# Altium PCB only pins(1).PcbDoc
Units mm, origin at the board's own origin, x right, y up, seen from the top; angles counter-clockwise.
Board outline 117.86 x 166.62 mm, 2 copper layers (F.Cu, B.Cu); 28 components, 14 nets, 128 pads, 11 vias.
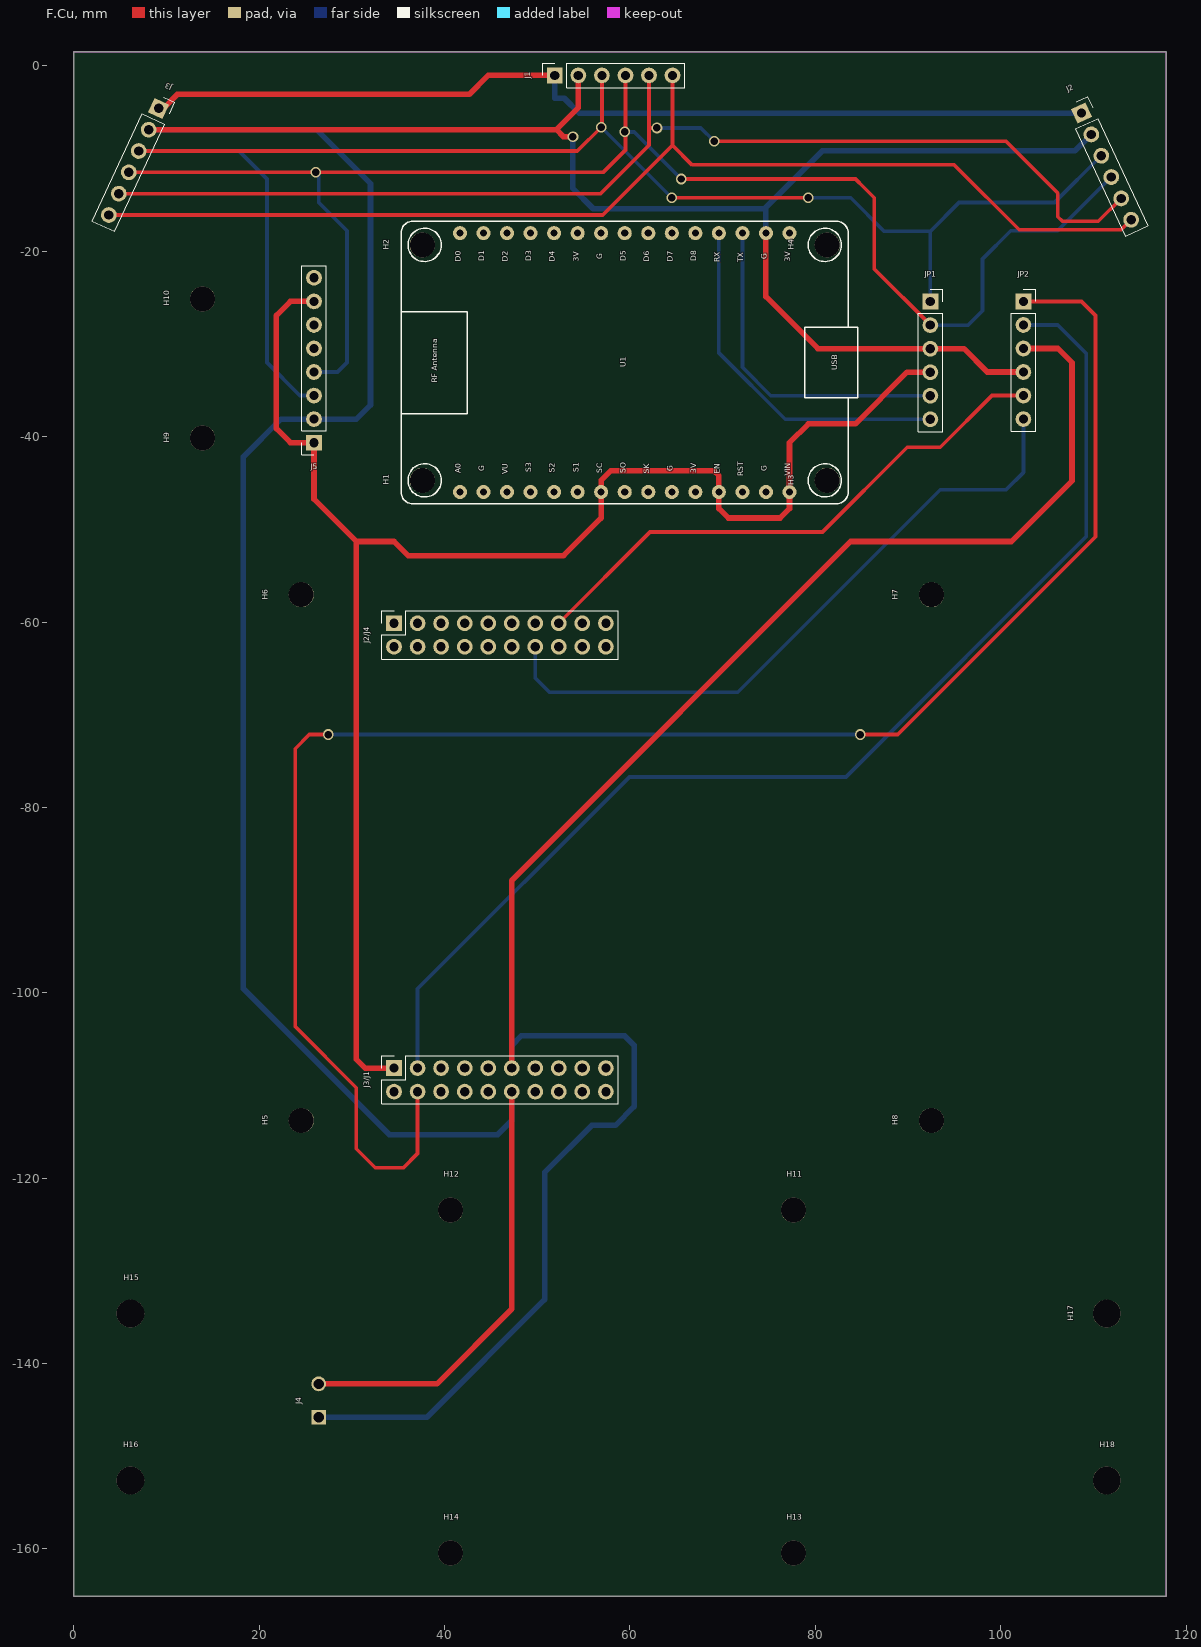
[diagram p0: F.Cu view]
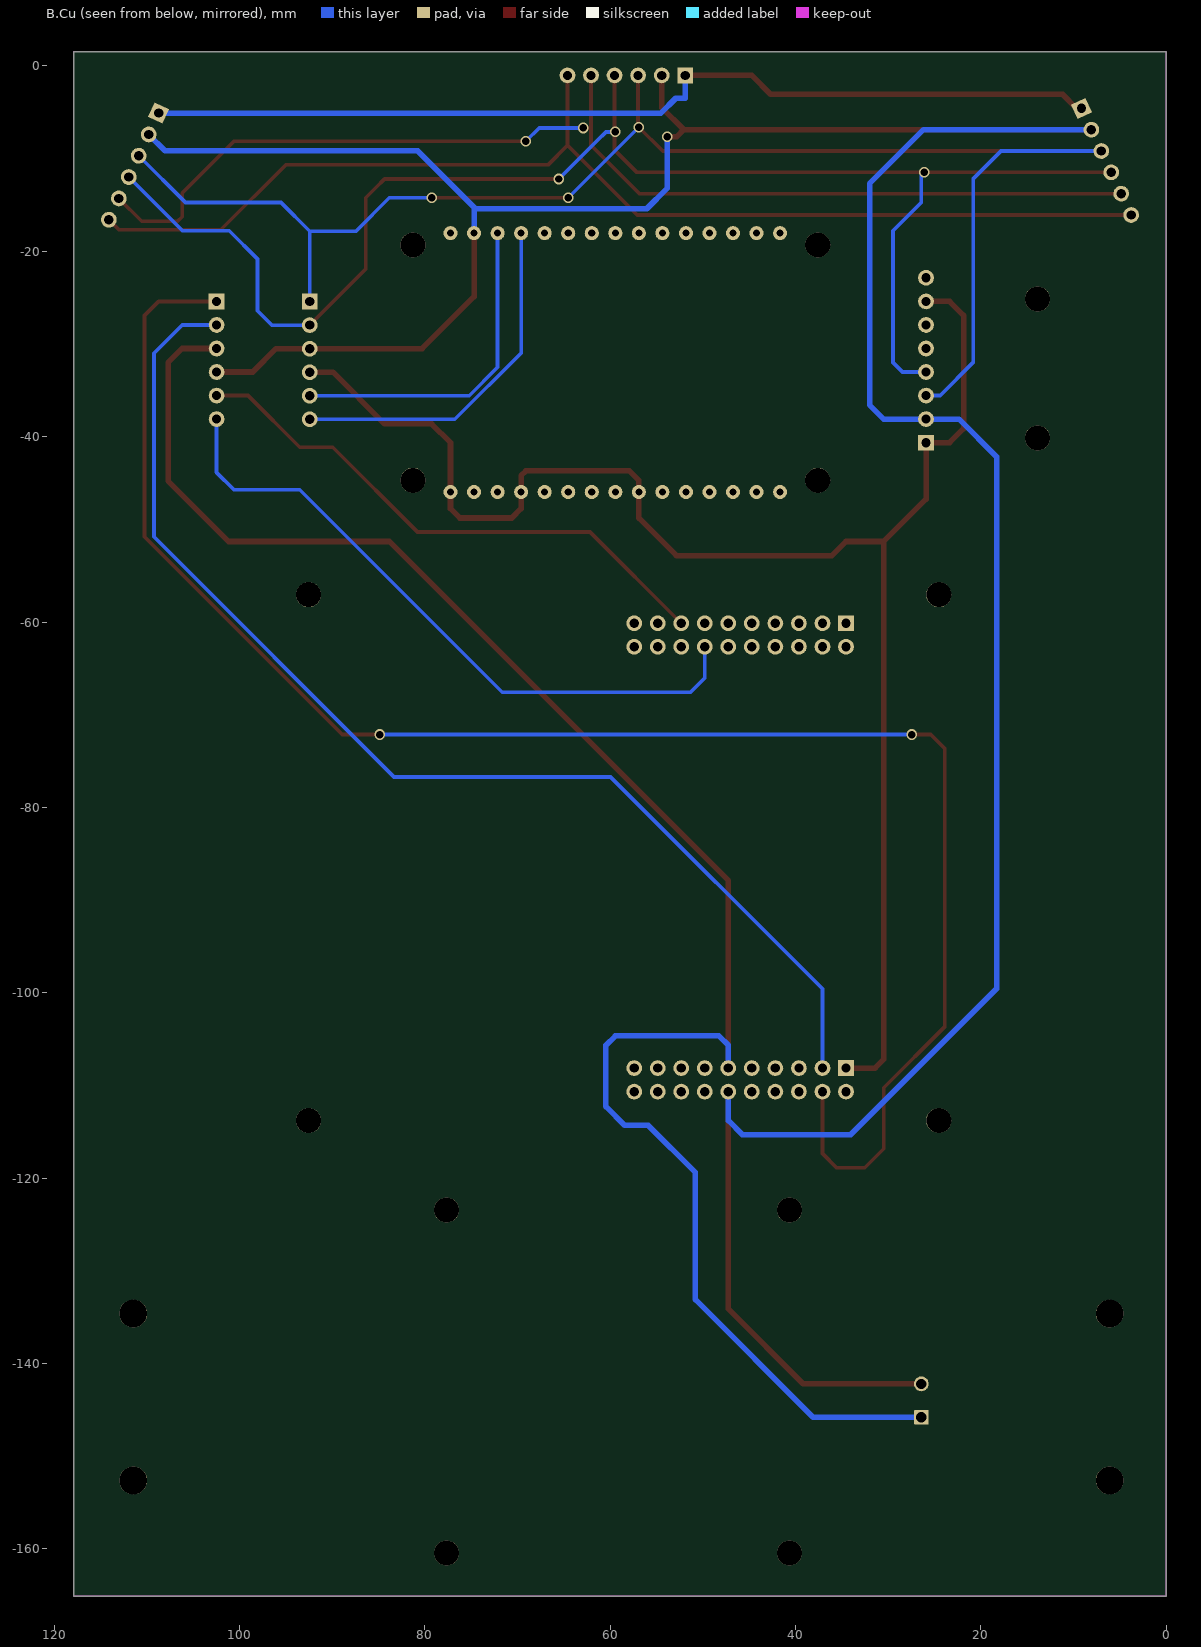
[diagram p1: B.Cu view, seen from below]

## Layer stack, top to bottom
F.Mask: solder mask 0.0102, Solder Resist, Dk 3.5
F.Cu: signal copper 0.0356
Dielectric 1: dielectric 0.32, FR-4, Dk 4.8
B.Cu: signal copper 0.0356
B.Mask: solder mask 0.0102, Solder Resist, Dk 3.5

## Board outline
0,-16.764 0,-165.1 10.16,-165.1 15.24,-165.1 117.856,-165.1 117.856,1.524 116.84,1.524 0,1.524 0,0 0,-16.764

## Design rules (kind name [scope] priority, off if disabled: settings)
Clearance "Clearence 0,3_NetClass" [InNetClass('Default') OR InNetClass('Power')] p1: gap=0.3 ignorepadtopadclearanceinfootprint=FALSE
HoleSize "Hole Size (Default)" [All] p1: absolutevalues=TRUE maxlimit=10 minlimit=0.3 maxpercent=80.000 minpercent=20.000
MinimumSolderMaskSliver [All] p1: minsoldermaskwidth=0
PolygonConnect [All] p1: connectstyle=Direct reliefconductorwidth=0.254 reliefentries=4 polygonreliefangle="90 Angle" airgapwidth=0.254
RoutingVias [All] p1: holewidth=0.711 width=1.27 viastyle="Through Hole" minholewidth=0.711 minwidth=1.27 maxholewidth=0.711 maxwidth=1.27
SilkToSilkClearance [All] p1: silktosilkclearance=0
SilkToSolderMaskClearance [IsPad] p1: minsilkscreentomaskgap=0 clearancetoexposedcopper=TRUE
SolderMaskExpansion [All] p1: expansion=0.102 istentingtop=FALSE
Width [All] p1: maxlimit=10 minlimit=0.2 preferedwidth=0.4 minimp=50.000000 maximp=50.000000 favimp=50.000000
26 further rules are at their usual default settings.

## Classes and differential pairs
net class Power: 3.3V 5V GND VIN
net class Default: A0_RX A0_TX GPIO1 HV3 HV4 LV1 LV2 LV3 LV4 XShutDown

## Components (designator, comment, footprint, x,y, rotation, side; value= is the part's Value field where it differs from the comment)
H1 "MountingHole" MountingHole_2.7mm#1 37.592,-44.704 r90 top
H2 "MountingHole" MountingHole_2.7mm#1 37.592,-19.304 r90 top
H3 "MountingHole" MountingHole_2.7mm#1 81.28,-44.704 r90 top
H4 "MountingHole" MountingHole_2.7mm#1 81.28,-19.304 r90 top
H5 "MountingHole" MountingHole_2.7mm#1 24.528,-113.792 r90 top
H6 "MountingHole" MountingHole_2.7mm#1 24.528,-57.048 r90 top
H7 "MountingHole" MountingHole_2.7mm#1 92.528,-57.048 r90 top
H8 "MountingHole" MountingHole_2.7mm#1 92.528,-113.792 r90 top
H9 "MountingHole" MountingHole_2.7mm#1 13.876,-40.132 r90 top
H10 "MountingHole" MountingHole_2.7mm#1 13.876,-25.132 r90 top
H11 "MountingHole" MountingHole_2.7mm#1 77.64,-123.444 r0 top
H12 "MountingHole" MountingHole_2.7mm#1 40.64,-123.444 r0 top
H13 "MountingHole" MountingHole_2.7mm#1 77.64,-160.444 r0 top
H14 "MountingHole" MountingHole_2.7mm#1 40.64,-160.444 r0 top
H15 "MountingHole_L" MountingHole_2.7mm#2 6.096,-134.62 r0 top
H16 "MountingHole_L" MountingHole_2.7mm#2 6.096,-152.62 r0 top
H17 "MountingHole_R" MountingHole_2.7mm#2 111.442,-134.62 r90 top
H18 "MountingHole_R" MountingHole_2.7mm#2 111.442,-152.62 r0 top
J1 "I2c" PinSocket_1x06_P2.54mm_Vertical 51.896,-1.016 r90 top
J2 "I2c" PinSocket_1x06_P2.54mm_Vertical 108.712,-5.08 r25 top
J2/J4 "~" PinSocket_2x10_P2.54mm_Vertical 34.544,-60.124 r90 top
J3 "I2c" PinSocket_1x06_P2.54mm_Vertical 9.144,-4.572 r335 top
J3/J1 "~" PinSocket_2x10_P2.54mm_Vertical 34.544,-108.124 r90 top
J4 "Power supply" SolderWire-0.1sqmm_1x02_P3.6mm_D0.4mm_OD1mm 26.416,-145.796 r90 top
J5 "gyro connector" PinSocket_1x08_P2.54mm_Vertical 25.908,-40.64 r180 top
JP1 "M06SIP" PinSocket_1x06_P2.54mm_Vertical 92.416,-25.418 r0 top
JP2 "M06SIP" PinSocket_1x06_P2.54mm_Vertical 102.456,-25.4 r0 top
U1 "NodeMCU_1.0_(ESP-12E)" NodeMCU1.0(12-E) 59.436,-32.004 r90 top

## Footprints (in the part's own frame and the unit in brackets; to place one, negate y for a bottom-side part, rotate by r counter-clockwise, add the part's x,y. Pads: shape width x height; smd on the part's side, far side on the other; paste and mask are expansions set on the pad)
MountingHole_2.7mm#1 [mm]
  round 2.7 hole 2.7 paste-2.7 mask+0: 1(0,0)
MountingHole_2.7mm#2 [mm]
  round 3 hole 3 paste-3 mask+0: Un1(0,0)
NodeMCU1.0(12-E) [mil]
  round 60 hole 30 paste-60 mask+0: 1(-550,700) 2(-550,600) 3(-550,500) 4(-550,400) 5(-550,300) 6(-550,200) 7(-550,100) 8(-550,0) 9(-550,-100) 10(-550,-200) 11(-550,-300) 12(-550,-400) 13(-550,-500) 14(-550,-600) 15(-550,-700) 16(550,-700) 17(550,-600) 18(550,-500) 19(550,-400) 20(550,-300) 21(550,-200) 22(550,-100) 23(550,0) 24(550,100) 25(550,200) 26(550,300) 27(550,400) 28(550,500) 29(550,600) 30(550,700)
  silkscreen extent -600,-989 600,950
PinSocket_1x06_P2.54mm_Vertical [mm]
  rect 1.7x1.7 hole 1 paste-1.7 mask+0: 1(0,0)
  rrect100% 1.7x1.7 hole 1 paste-1.7 mask+0: 2(0,-2.54) 3(0,-5.08) 4(0,-7.62) 5(0,-10.16) 6(0,-12.7)
  silkscreen extent -1.33,-14.03 1.33,1.33
PinSocket_1x08_P2.54mm_Vertical [mm]
  rect 1.7x1.7 hole 1 paste-1.7 mask+0: 1(0,0)
  rrect100% 1.7x1.7 hole 1 paste-1.7 mask+0: 2(0,-2.54) 3(0,-5.08) 4(0,-7.62) 5(0,-10.16) 6(0,-12.7) 7(0,-15.24) 8(0,-17.78)
  silkscreen extent -1.33,-19.11 1.33,1.33
PinSocket_2x10_P2.54mm_Vertical [mm]
  rect 1.7x1.7 hole 1 paste-1.7 mask+0: 1(0,0)
  rrect100% 1.7x1.7 hole 1 paste-1.7 mask+0: 2(-2.54,0) 3(0,-2.54) 4(-2.54,-2.54) 5(0,-5.08) 6(-2.54,-5.08) 7(0,-7.62) 8(-2.54,-7.62) 9(0,-10.16) 10(-2.54,-10.16) 11(0,-12.7) 12(-2.54,-12.7) 13(0,-15.24) 14(-2.54,-15.24) 15(0,-17.78) 16(-2.54,-17.78) 17(0,-20.32) 18(-2.54,-20.32) 19(0,-22.86) 20(-2.54,-22.86)
  silkscreen extent -3.87,-24.19 1.33,1.33
SolderWire-0.1sqmm_1x02_P3.6mm_D0.4mm_OD1mm [mm]
  rrect16% 1.6x1.6 hole 1.1 paste-1.6 mask+0: 1(0,0)
  round 1.6 hole 1.1 paste-1.6 mask+0: 2(3.6,0)

## Part data
H1 H2 H3 H4 H5 H6 H7 H8 H9 H10 H11 H12 H13 H14 H15 H16 H17 H18: library part MountingHole_2.7mm, "Mounting Hole 2.7mm, no annular"
J1 J2 J3 JP1 JP2: library part PinSocket_1x06_P2.54mm_Vertical, "Through hole straight socket strip, 1x06, 2.54mm pitch, single row (from Kicad 4.0.7), script generated"
J2/J4 J3/J1: library part PinSocket_2x10_P2.54mm_Vertical, "Through hole straight socket strip, 2x10, 2.54mm pitch, double cols (from Kicad 4.0.7), script generated"
J4: library part SolderWire-0.1sqmm_1x02_P3.6mm_D0.4mm_OD1mm, "Soldered wire connection, for 2 times 0.1 mm² wires, basic insulation, conductor diameter 0.4mm, outer diameter 1mm, size source Multi-Contact FLEXI-E 0.1 (https://ec.staubli.com/AcroFiles/Catalogues/TM_Cab-Main-11014119_(en)_hi.pdf), bend radius 3 times outer diameter, generated with kicad-footprint-generator"
J5: library part PinSocket_1x08_P2.54mm_Vertical, "Through hole straight socket strip, 1x08, 2.54mm pitch, single row (from Kicad 4.0.7), script generated"
U1: library part NodeMCU1.0(12-E)

## Via types
v1: diameter 1.15, hole 0.8, F.Cu to B.Cu, tented both sides, 11 vias

## Nets (pads, with @x,y where several pads share a name; then routed paths per layer and width w, separated by ;. In a path a pad name is that pad's centre, name@x,y a point inside that pad or via, vN(x,y) a via of type N, cw(c..) or ccw(c..) an arc to the next point about the centre after c; other vN are vias at no path point)
3.3V: J3/J1.1 J5.1 J5.7 JP1.4 U1.7 U1.12 U1.15 | length 178.1
  F.Cu w0.6: J5.7 23.368,-25.4 21.844,-26.924 21.844,-39.116 23.368,-40.64 J5.1 25.908,-46.736 30.48,-51.308 ; J3/J1.1 31.416,-108.124 30.48,-107.188 30.48,-58.42 30.48,-51.308 ; JP1.4 89.898,-33.038 84.328,-38.608 79.248,-38.608 77.216,-40.64 U1.15 77.216,-47.752 76.2,-48.768 70.612,-48.768 69.596,-47.752 U1.12 69.596,-44.196 69.088,-43.688 57.912,-43.688 56.896,-44.704 U1.7 56.896,-48.768 52.832,-52.832 36.068,-52.832 34.544,-51.308 30.48,-51.308
5V: J3/J1.11 J4.1 JP2.3 | length 196.3
  F.Cu w0.6: J3/J1.11 47.244,-87.884 83.82,-51.308 101.154,-51.308 107.696,-44.766 107.696,-32.004 106.172,-30.48 JP2.3
  B.Cu w0.6: J4.1 38.1,-145.796 50.8,-133.096 50.8,-119.38 55.88,-114.3 58.42,-114.3 60.452,-112.268 60.452,-105.664 59.436,-104.648 48.26,-104.648 47.244,-105.664 J3/J1.11
A0_RX: J3/J1.3 JP2.2 | length 128.7
  B.Cu w0.4: J3/J1.3 37.084,-99.568 59.944,-76.708 83.312,-76.708 109.22,-50.8 109.22,-30.988 106.172,-27.94 JP2.2
A0_TX: J3/J1.4 JP2.1 | length 188.8
  F.Cu w0.4: v1(27.432,-72.136) 25.4,-72.136 23.876,-73.66 23.876,-103.632 30.48,-110.236 30.48,-116.84 32.512,-118.872 35.56,-118.872 37.084,-117.348 37.084,-116.84 J3/J1.4 ; v1(84.836,-72.136) 88.9,-72.136 110.236,-50.8 110.236,-26.924 108.712,-25.4 JP2.1
  B.Cu w0.4: v1(27.432,-72.136) v1(84.836,-72.136)
GND: J1.2 J2.2 J3.2 J3/J1.12 J4.2 J5.2 JP1.3 JP2.4 U1.17 | length 370
  F.Cu w0.6: J3.2 52.054,-6.874 ; J4.2 39.16,-142.196 47.244,-134.112 J3/J1.12 ; v1(53.848,-7.62) 52.8,-7.62 52.054,-6.874 ; J1.2 54.436,-4.492 52.054,-6.874 ; U1.17 74.676,-24.892 80.282,-30.498 JP1.3 96.03,-30.498 98.552,-33.02 JP2.4
  B.Cu w0.6: J3.2 26.178,-6.874 32.004,-12.7 32.004,-36.576 30.48,-38.1 J5.2 22.352,-38.1 18.288,-42.164 18.288,-99.568 34.036,-115.316 45.72,-115.316 47.244,-113.792 J3/J1.12 ; v1(53.848,-7.62) 53.848,-13.208 56.039,-15.399 74.517,-15.399 74.676,-15.24 ; U1.17 74.676,-15.24 ; J2.2 108.023,-9.144 80.772,-9.144 74.676,-15.24
GPIO1: J1.5 J2.5 J3.5 | length 124.5
  F.Cu w0.4: J3.5 56.832,-13.78 62.056,-8.556 62.056,-6.684 ; J1.5 62.056,-6.684 ; v1(62.912,-6.684) 62.056,-6.684 ; v1(69.088,-8.128) 100.584,-8.128 106.172,-13.716 106.172,-16.256 106.68,-16.764 110.53,-16.764 J2.5
  B.Cu w0.4: v1(62.912,-6.684) 67.644,-6.684 v1(69.088,-8.128)
HV3: J2/J4.15 JP2.5 | length 60.3
  F.Cu w0.4: J2/J4.15 62.156,-50.292 80.772,-50.292 89.916,-41.148 93.472,-41.148 99.06,-35.56 JP2.5
HV4: J2/J4.14 JP2.6 | length 72.3
  B.Cu w0.4: J2/J4.14 49.784,-66.04 51.308,-67.564 71.628,-67.564 93.472,-45.72 100.584,-45.72 102.456,-43.848 JP2.6
LV1: JP1.6 U1.19 | length 38.7
  B.Cu w0.4: U1.19 69.596,-30.962 76.752,-38.118 JP1.6
LV2: JP1.5 U1.18 | length 36
  B.Cu w0.4: U1.18 72.136,-32.512 75.202,-35.578 JP1.5
LV3: J1.4 J2.4 J3.4 J5.4 JP1.2 | length 164
  F.Cu w0.4: J3.4 v1(26.114,-11.478) 57.102,-11.478 59.516,-9.064 J1.4 ; v1(65.532,-12.192) 66.548,-12.192 84.328,-12.192 85.285,-13.149 86.36,-14.224 86.36,-21.902 JP1.2
  B.Cu w0.4: J5.4 28.448,-33.02 29.464,-32.004 29.464,-17.78 26.416,-14.732 26.416,-11.78 v1(26.114,-11.478) ; v1(59.436,-7.112) 60.452,-7.112 61.468,-8.128 v1(65.532,-12.192) ; JP1.2 96.502,-27.958 98.044,-26.416 98.044,-20.828 101.092,-17.78 106.138,-17.78 J2.4
LV4: J1.3 J2.3 J3.3 J5.3 JP1.1 | length 167.6
  F.Cu w0.4: J3.3 54.324,-9.176 v1(56.896,-6.604) 56.976,-6.524 J1.3 ; v1(64.516,-14.224) v1(79.248,-14.224)
  B.Cu w0.4: J3.3 17.812,-9.176 20.828,-12.192 20.828,-32.004 24.384,-35.56 J5.3 ; v1(56.896,-6.604) v1(64.516,-14.224) ; v1(79.248,-14.224) 83.82,-14.224 87.416,-17.82 92.416,-17.82 ; JP1.1 92.416,-17.82 ; J2.3 105.811,-14.732 95.504,-14.732 92.416,-17.82
VIN: J1.1 J2.1 J3.1 | length 104.9
  F.Cu w0.6: J3.1 9.652,-4.572 11.176,-3.048 42.672,-3.048 44.704,-1.016 J1.1
  B.Cu w0.25: J3.1 J3.1@9.652,-5.08
  B.Cu w0.6: J1.1 51.896,-3.476 52.912,-3.476 54.516,-5.08 J2.1
XShutDown: J1.6 J2.6 J3.6 | length 125.2
  F.Cu w0.4: J3.6 57.07,-16.082 64.596,-8.556 ; J1.6 64.596,-8.556 ; J2.6 112.988,-17.681 102.009,-17.681 94.996,-10.668 66.708,-10.668 64.596,-8.556
pads on no net: H1.1 H2.1 H3.1 H4.1 H5.1 H6.1 H7.1 H8.1 H9.1 H10.1 H11.1 H12.1 H13.1 H14.1 H15.Un1 H16.Un1 H17.Un1 H18.Un1 J2/J4.1 J2/J4.2 J2/J4.3 J2/J4.4 J2/J4.5 J2/J4.6 J2/J4.7 J2/J4.8 J2/J4.9 J2/J4.10 J2/J4.11 J2/J4.12 J2/J4.13 J2/J4.16 J2/J4.17 J2/J4.18 J2/J4.19 J2/J4.20 J3/J1.2 J3/J1.5 J3/J1.6 J3/J1.7 J3/J1.8 J3/J1.9 J3/J1.10 J3/J1.13 J3/J1.14 J3/J1.15 J3/J1.16 J3/J1.17 J3/J1.18 J3/J1.19 J3/J1.20 J5.5 J5.6 J5.8 U1.1 U1.2 U1.3 U1.4 U1.5 U1.6 U1.8 U1.9 U1.10 U1.11 U1.13 U1.14 U1.16 U1.20 U1.21 U1.22 U1.23 U1.24 U1.25 U1.26 U1.27 U1.28 U1.29 U1.30

## Keep-outs
Edge.Cuts:
  lines w0.05: 0,-165.1 10.16,-165.1 ; 0,-165.1 0,-16.764 ; 0,-165.1 10.16,-165.1 ; 0,-165.1 0,-16.764 ; 0,-16.764 0,0 ; 0,-16.764 0,0 ; 0,0 0,1.524 ; 0,0 0,1.524 ; 0,1.524 116.84,1.524 ; 0,1.524 116.84,1.524 ; 10.16,-165.1 15.24,-165.1 ; 10.16,-165.1 15.24,-165.1 ; 15.24,-165.1 117.856,-165.1 ; 15.24,-165.1 117.856,-165.1 ; 116.84,1.524 117.856,1.524 ; 116.84,1.524 117.856,1.524 ; 117.856,-165.1 117.856,1.524 ; 117.856,-165.1 117.856,1.524

## Dimensions
72.644,-19.304 to 72.644,-44.704 on Dwgs.User
101.6,-30.48 to 93.472,-30.48 on Dwgs.User
90.932,-113.792 to 26.416,-113.792 on Dwgs.User
92.456,-58.928 to 92.456,-112.268 on Dwgs.User
76.2,-123.444 to 42.164,-123.444 on Dwgs.User
40.64,-159.004 to 40.64,-124.968 on Dwgs.User
81.28,-20.828 to 81.026,-42.908 on Dwgs.User
79.23,-44.704 to 39.624,-44.704 on Dwgs.User

## Text inside footprints (layer, text, board x,y; h text height)
U1: F.SilkS "USB" at 82.608,-32.854 h1 r90; F.SilkS "RF Antenna" at 39.427,-34.186 h1 r90; F.SilkS "VIN" at 77.521,-44.226 h1 r90; F.SilkS "G" at 74.988,-43.737 h1 r90; F.SilkS "RST" at 72.448,-44.241 h1 r90; F.SilkS "EN" at 69.899,-44.02 h1 r90; F.SilkS "3V" at 67.367,-43.962 h1 r90; F.SilkS "G" at 64.828,-43.737 h1 r90; F.SilkS "SK" at 62.288,-43.986 h1 r90; F.SilkS "SO" at 59.748,-43.965 h1 r90; F.SilkS "SC" at 57.208,-43.942 h1 r90; F.SilkS "S1" at 54.668,-43.828 h1 r90; F.SilkS "S2" at 52.128,-43.864 h1 r90; F.SilkS "S3" at 49.588,-43.845 h1 r90; F.SilkS "VU" at 47.041,-44.076 h1 r90; F.SilkS "G" at 44.508,-43.737 h1 r90; F.SilkS "A0" at 41.966,-43.966 h1 r90; F.SilkS "3V" at 77.527,-21.102 h1 r90; F.SilkS "G" at 74.988,-20.877 h1 r90; F.SilkS "TX" at 72.435,-21.156 h1 r90; F.SilkS "RX" at 69.895,-21.187 h1 r90; F.SilkS "D8" at 67.366,-21.091 h1 r90; F.SilkS "D7" at 64.821,-21.096 h1 r90; F.SilkS "D6" at 62.286,-21.1 h1 r90; F.SilkS "D5" at 59.74,-21.087 h1 r90; F.SilkS "G" at 57.208,-20.877 h1 r90; F.SilkS "3V" at 54.667,-21.102 h1 r90; F.SilkS "D4" at 52.121,-21.101 h1 r90; F.SilkS "D3" at 49.586,-21.08 h1 r90; F.SilkS "D2" at 47.041,-21.098 h1 r90; F.SilkS "D1" at 44.501,-21.062 h1 r90; F.SilkS "D0" at 41.966,-21.101 h1 r90